# Altium PCB ClimaSens-Sensor.PcbDoc
Units mm, origin at the board's own origin, x right, y up, seen from the top; angles counter-clockwise.
Board outline 27.01 x 34.01 mm, 2 copper layers (Top Layer, Bottom Layer); 8 components, 11 nets, 43 pads, 5 vias.
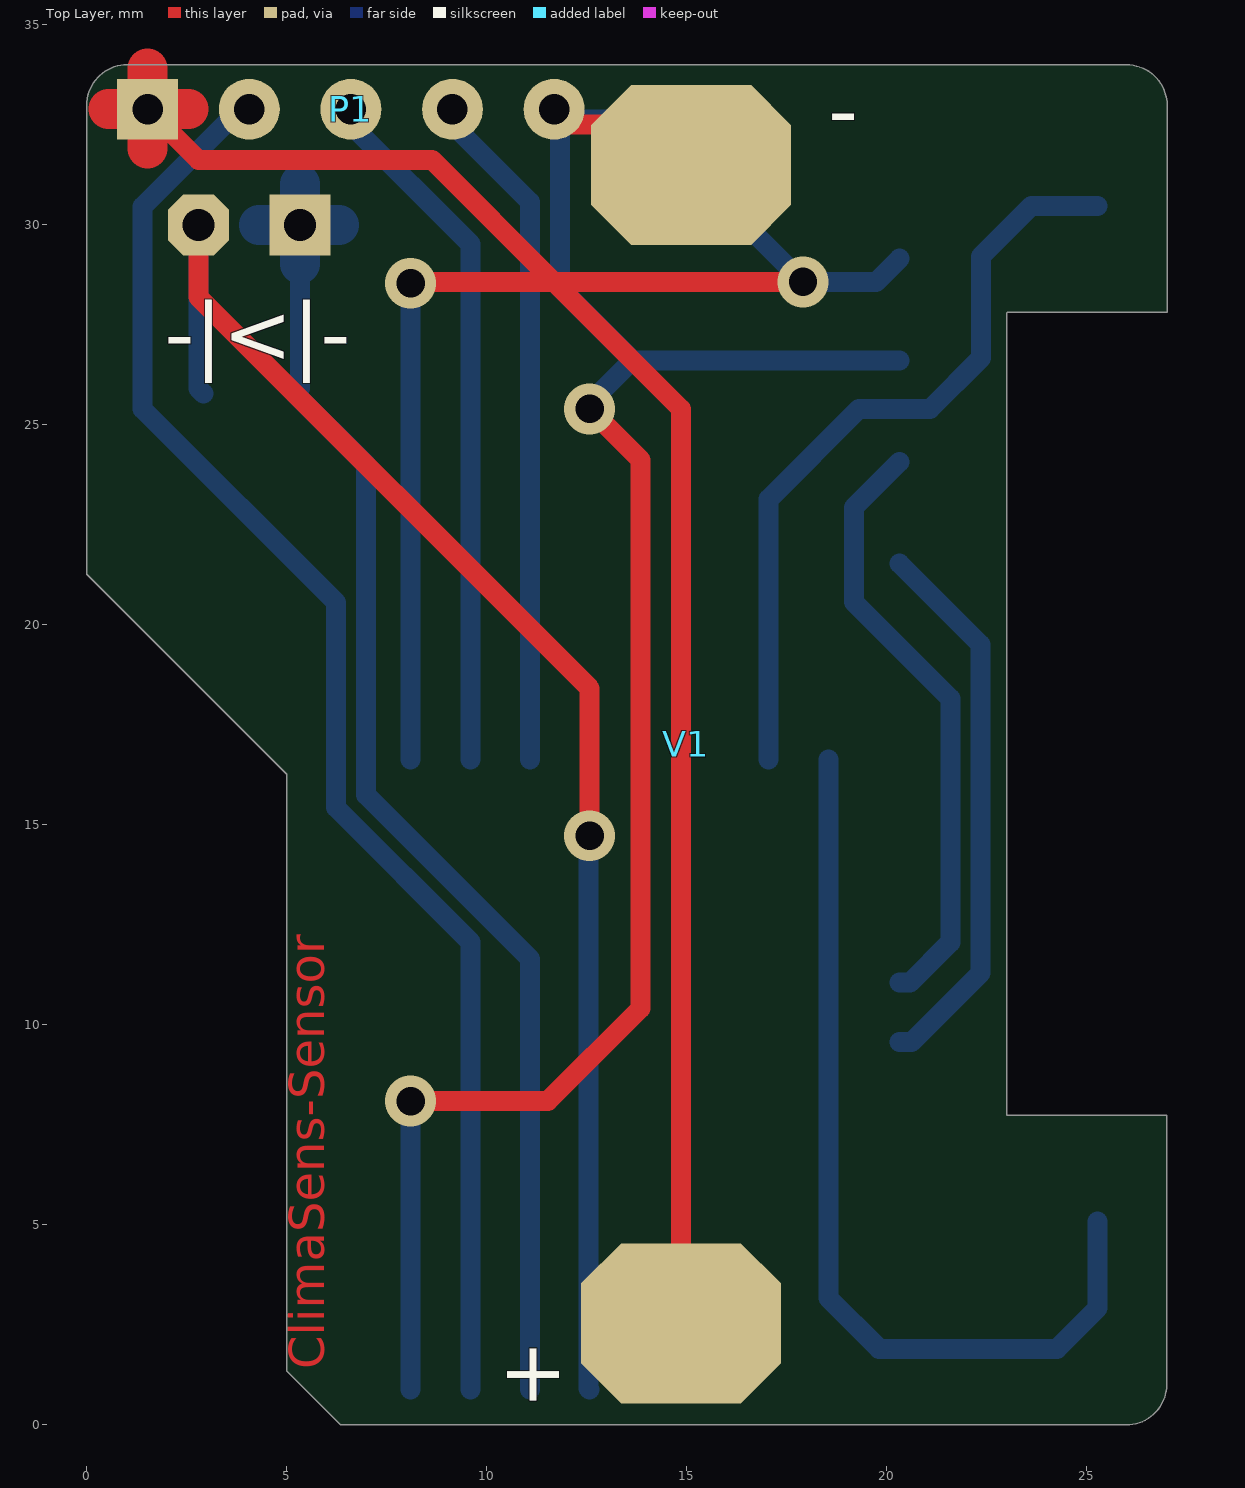
[diagram p0: Top Layer view]
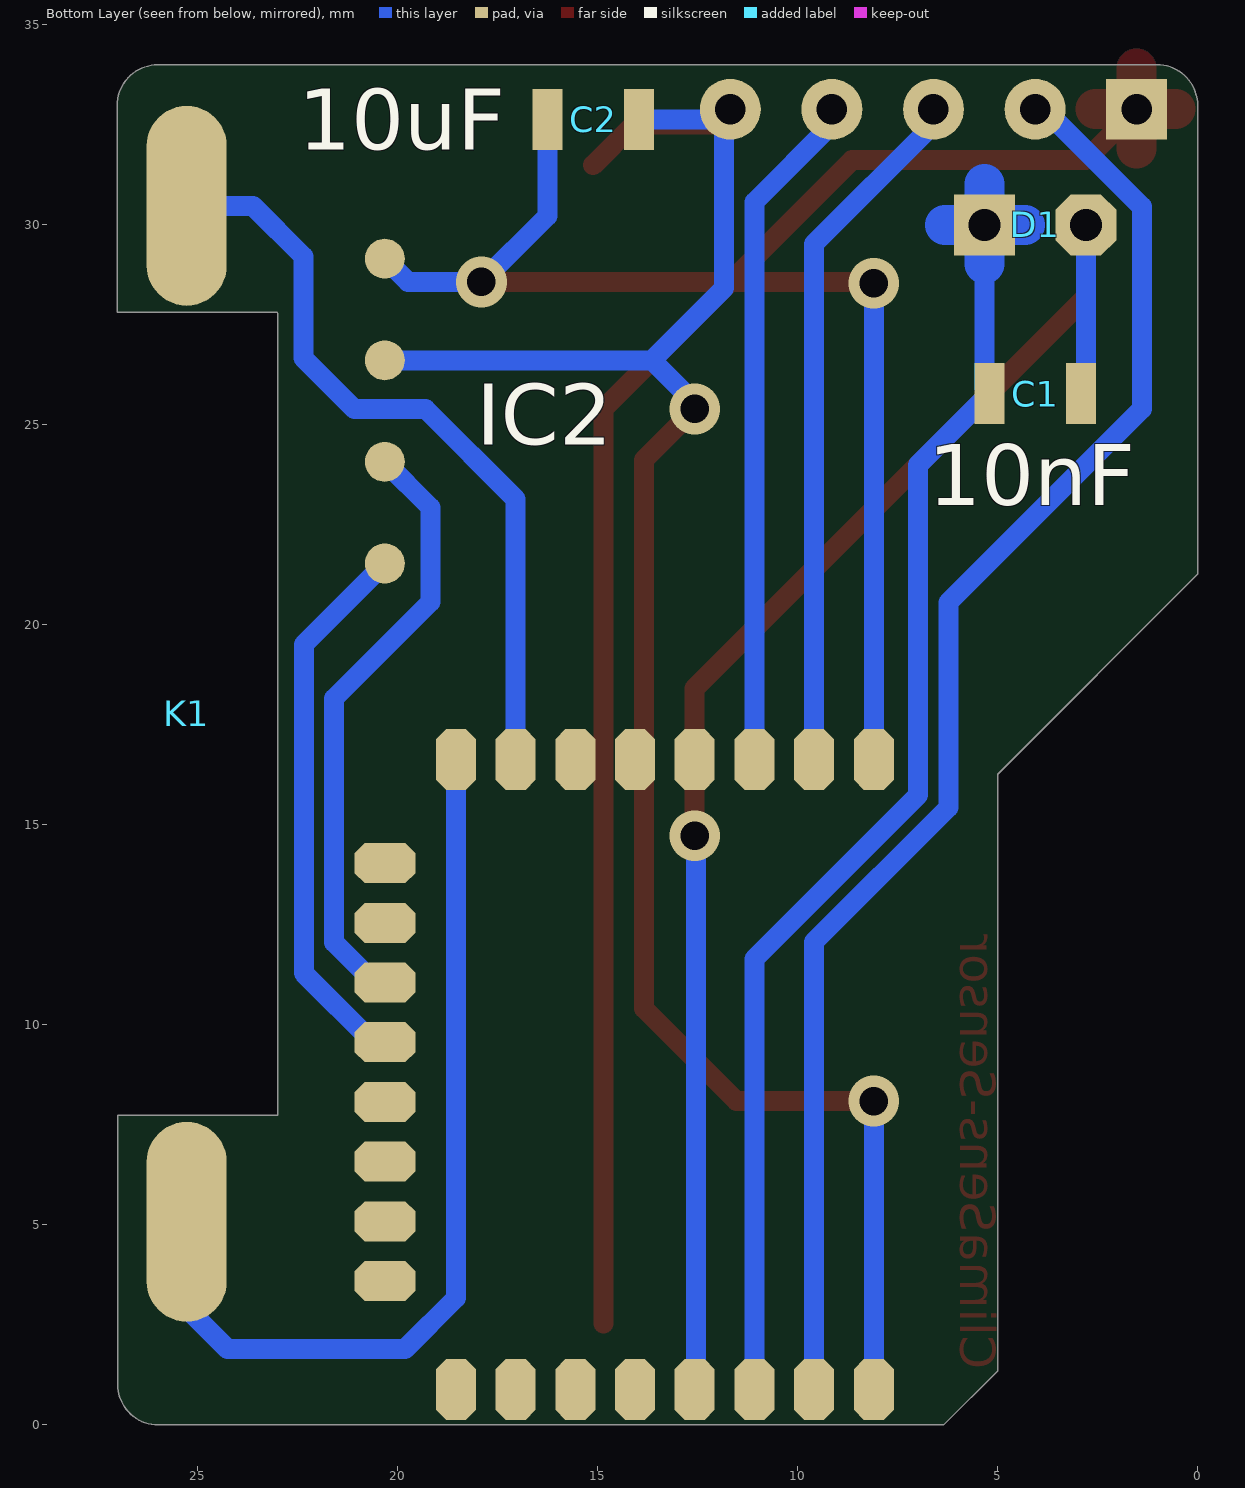
[diagram p1: Bottom Layer view, seen from below]

## Layer stack, top to bottom
Top Solder: solder mask 0.0102, Solder Resist, Dk 3.5
Top Layer: signal copper 0.0356
Dielectric 1: dielectric 0.32, FR-4, Dk 4.8
Bottom Layer: signal copper 0.0356
Bottom Solder: solder mask 0.0102, Solder Resist, Dk 3.5

## Board outline
4.999,1.351 4.999,16.27 0,21.269 0,32.99 cw(c1.016,32.99) 1.016,34.006 1.016,34.004 25.995,34.004 cw(c25.995,32.988) 27.011,32.988 27.014,32.988 27.014,27.813 23.014,27.813 23,27.799 23,7.747 27,7.747 27,1.016 cw(c25.984,1.016) 25.984,0 6.35,0

## Design rules (kind name [scope] priority, off if disabled: settings)
Clearance [All] p1: gap=0.254 ignorepadtopadclearanceinfootprint=FALSE except(0: Arc-Hole Track-Hole SMDPad-Hole THPad-Hole Via-Hole Fill-Hole Poly-Hole Region-Hole Text-Hole)
PolygonConnect [All] p1: connectstyle=Relief reliefconductorwidth=0.254 reliefentries=4 polygonreliefangle="90 Angle" airgapwidth=0.254
RoutingVias [All] p1: holewidth=0.711 width=1.27 viastyle="Through Hole" minholewidth=0.711 minwidth=1.27 maxholewidth=0.711 maxwidth=1.27
SolderMaskExpansion [All] p1: expansion=0.102
Width [All] p1: maxlimit=1 minlimit=0.1 preferedwidth=0.5 minimp=50.000000 maximp=50.000000 favimp=50.000000
30 further rules are at their usual default settings.

## Components (designator, comment, footprint, x,y, rotation, side; value= is the part's Value field where it differs from the comment)
C1 "10nF" 0805 4.064,25.781 r180 bottom
C2 "10uF" 0805 15.113,32.639 r180 bottom
D1 "LED" "LED 3mm" 4.064,30 r180 bottom
IC2 "Si7021" Si7021 8.128,30.607 r0 bottom
K1 "Reed" Reed 23.749,7.747 r90 bottom
P1 "Vcc" ProgramPort 1.524,32.893 r0 top
V1 "Vcc" Battery-Clip 14.986,17.018 r90 top
? "JDY-08 CC2541" "JDY-08 CC2541" -0.001,1.27 r90 bottom

## Footprints (in the part's own frame and the unit in brackets; to place one, negate y for a bottom-side part, rotate by r counter-clockwise, add the part's x,y. Pads: shape width x height; smd on the part's side, far side on the other; paste and mask are expansions set on the pad)
0805 [mil]
  rect 29.53x60 smd: 1(-45,0) 2(45,0)
  body extent -40,-24 39,25, height 39
Battery-Clip [mm]
  oct 4x5 smd: 1(-14.478,0.127) 2(14.478,-0.127)
  body extent -14.5,-10 14.5,10, height 5.5
"JDY-08 CC2541" [mil]
  oct 60x39.37 smd: 1(605,318.82) 2(605,377.56) 3(605,436.3) 4(605,495.04) 5(605,553.78) 6(605,612.52) 7(605,671.26) 8(605,730) 17(-15,318.82) 18(-15,377.56) 19(-15,436.3) 20(-15,495.04) 21(-15,553.78) 22(-15,612.52) 23(-15,671.26) 24(-15,730)
  oct 39.37x60 smd: 9(502.91,800) 10(444.17,800) 11(385.43,800) 12(326.69,800) 13(267.95,800) 14(209.21,800) 15(150.47,800) 16(91.73,800)
  body extent 0,0 591,787, height 79
"LED 3mm" [mil]
  rect 60x60 hole 31.5: 1(-50,0)
  oct 60x60 hole 31.5: 2(50,0)
  Top Layer lines w39.37: -9.68,0 -88.43,0 ; -50,-38.43 -50,40.31
  body extent -79,-79 79,79, height 217
ProgramPort [mil]
  rect 60x60 hole 30: 1(0,0)
  round 60 hole 30: 2(100,0) 3(200,0) 4(300,0) 5(400,0)
  Top Layer lines w39.37: -38.43,0 40.32,0 ; 0,-38.43 0,40.32
Reed [mm]
  oval 5x2 smd: 1(-2.667,1.524) 2(22.733,1.524)
  body extent 0,0.03 20,3.02, height 1.99
Si7021 [mm]
  round 1 smd: 1(12.192,1.45) 2(12.192,3.99) 3(12.192,6.53) 4(12.192,9.07)
  body extent 0,0 13.5,10.5, height 2.5

## Part data
C1 C2: library part Capacitator
P1: library part ProgramPort
V1: library part "Battery Clip"

## Via types
v1: diameter 1.27, hole 0.711, Top Layer to Bottom Layer, tented both sides, 5 vias

## Nets (pads, with @x,y where several pads share a name; then routed paths per layer and width w, separated by ;. In a path a pad name is that pad's centre, name@x,y a point inside that pad or via, vN(x,y) a via of type N, cw(c..) or ccw(c..) an arc to the next point about the centre after c; other vN are vias at no path point)
GND: ?.17 C2.2 IC2.2 P1.5 V1.2 | length 50.7
  Top Layer w0.5: v1(8.097,8.097) 11.526,8.097 13.843,10.414 13.843,24.13 v1(12.573,25.4) ; P1.5@11.684,32.512 14.097,32.512 V1.2
  Bottom Layer w0.5: ?.17 v1(8.097,8.097) ; P1.5@11.684,32.512 11.835,32.361 11.835,28.424 13.642,26.617 ; P1.5 11.938,32.639 C2.2 ; v1(12.573,25.4) 12.573,25.548 13.642,26.617 ; IC2.2 13.642,26.617
Net_2: ?.2 P1.3 | length 17.1
  Bottom Layer w0.5: P1.3@6.604,32.512 9.589,29.527 ?.2
Net_3: ?.3 P1.4 | length 16.7
  Bottom Layer w0.5: P1.4@9.144,32.512 11.081,30.575 ?.3
Net_7: ?.7 K1.2 | length 19.3
  Bottom Layer w0.5: ?.7 17.049,23.145 19.304,25.4 21.082,25.4 22.352,26.67 22.352,29.21 23.622,30.48 K1.2
Net_8: ?.8 K1.1 | length 23.3
  Bottom Layer w0.5: ?.8 18.541,3.176 19.812,1.905 24.257,1.905 25.272,2.92 K1.1
Net_11: ?.11 IC2.3 | length 15.2
  Bottom Layer w0.5: ?.11 20.585,11.06 21.59,12.065 21.59,18.161 19.177,20.574 19.177,22.934 IC2.3
Net_12: ?.12 IC2.4 | length 13.8
  Bottom Layer w0.5: ?.12 20.617,9.568 22.344,11.295 22.344,19.513 IC2.4
Net_18: ?.18 P1.2 | length 36.8
  Bottom Layer w0.5: P1.2@3.95,32.512 P1.2@4.064,32.512 ; P1.2 3.831,32.893 1.397,30.459 1.397,25.4 6.231,20.566 6.231,15.436 9.589,12.078 ?.18
Net_19: ?.19 C1.1 D1.1 | length 31.1
  Bottom Layer w0.5: D1.1@5.334,29.5 5.334,28.524 5.334,25.908 C1.1 6.985,24.003 6.985,15.748 11.081,11.652 ?.19
Net_20: ?.20 C1.2 D1.2 | length 36.5
  Top Layer w0.5: D1.2@2.794,29.5 2.794,28.194 12.573,18.415 v1(12.573,14.732)
  Bottom Layer w0.5: D1.2@2.794,29.5 2.794,25.908 C1.2 ; ?.20 12.546,0.916 12.546,14.705 v1(12.573,14.732)
Vcc: ?.1 C2.1 IC2.1 P1.1 V1.1 | length 68.2
  Top Layer w0.5: P1.1 2.794,31.623 8.636,31.623 11.684,28.575 ; v1@8.32,28.575 11.684,28.575 ; V1.1 14.859,25.4 11.684,28.575 ; v1(17.907,28.575) 11.684,28.575
  Bottom Layer w0.5: ?.1 v1(8.097,28.544) ; C2.1 16.256,30.226 v1(17.907,28.575) 19.738,28.575 IC2.1
pads on no net: ?.4 ?.5 ?.6 ?.9 ?.10 ?.13 ?.14 ?.15 ?.16 ?.21 ?.22 ?.23 ?.24

## Other copper
Top Layer:
  text "ClimaSens-Sensor" at 6.223,1.397 h1.5 r90

## Silkscreen, mask and mechanical layers (free items; w line width, h text height)
Top Solder:
  text "ClimaSens-Sensor" at 6.223,1.397 h1.5 r90
Mechanical 1:
  lines w0.1: 0,21.336 0,0 6.35,0
  lines w0.254: 4.064,29.5 4.064,29.5
Mechanical 2:
  lines w0.1: 1.016,34.004 25.995,34.004 cw(c25.995,32.988) 27.011,32.988 ; 1.016,34.006 ccw(c1.016,32.99) 0,32.99 0,21.269 4.999,16.27 4.999,1.351 6.35,0 25.984,0 ccw(c25.984,1.016) 27,1.016 27,7.747 23,7.747 23,27.799 ; 23.014,27.813 27.014,27.813 27.014,32.988

## Text inside footprints (layer, text, board x,y; h text height)
D1: Top Overlay "-|>|-" at 6.604,26.543 h1.52
V1: Top Overlay "-" at 18.542,32.131 h1.52; Top Overlay "+" at 11.811,0.381 h1.52 r90